# EAGLE board Replicape_B1 (EAGLE 6.6.0), part 1 of 2
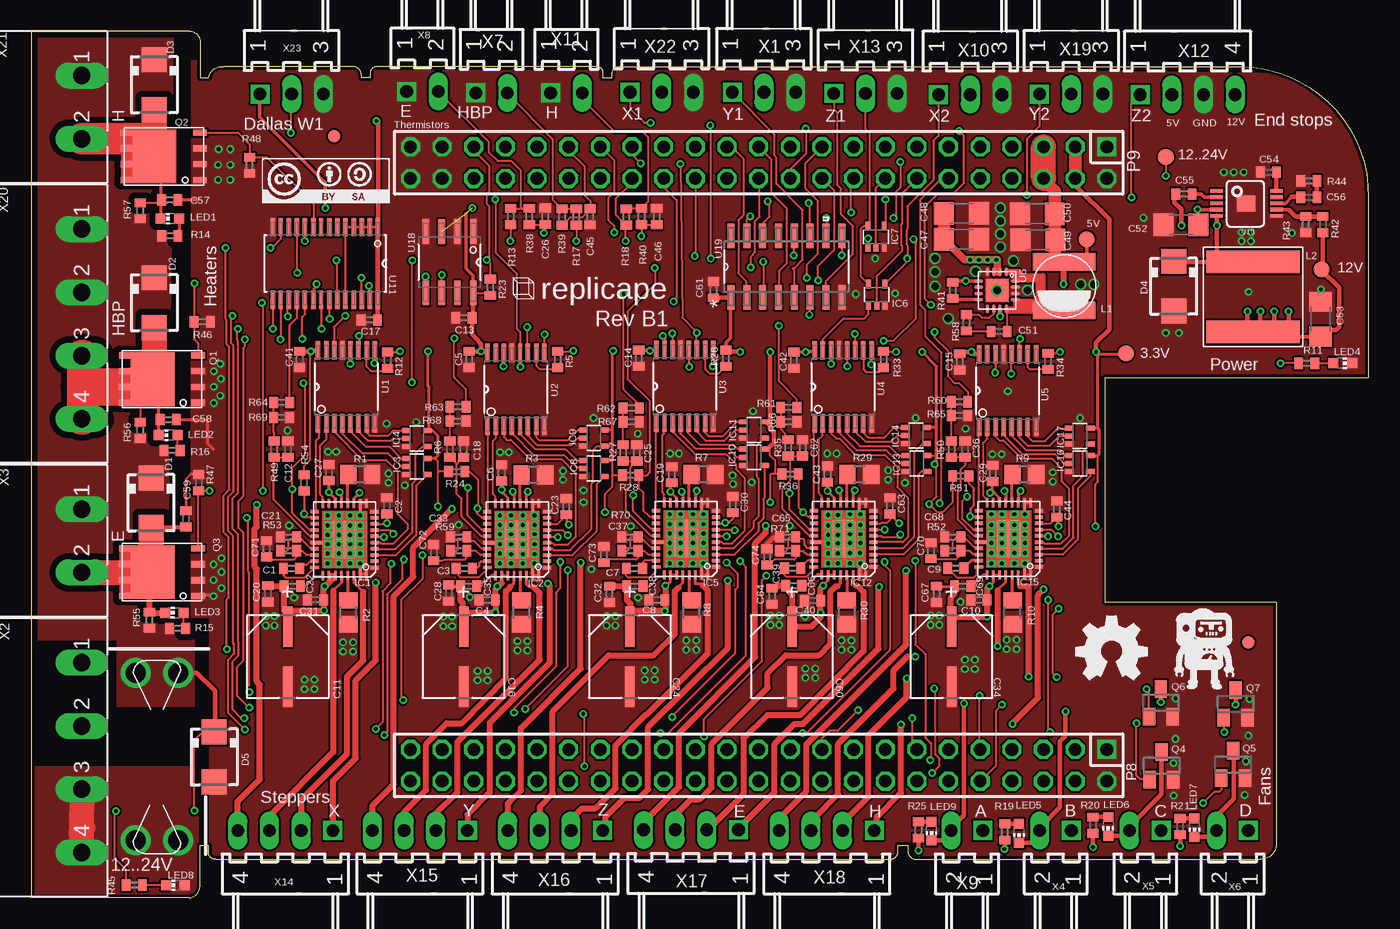
[diagram p0: board, top side]
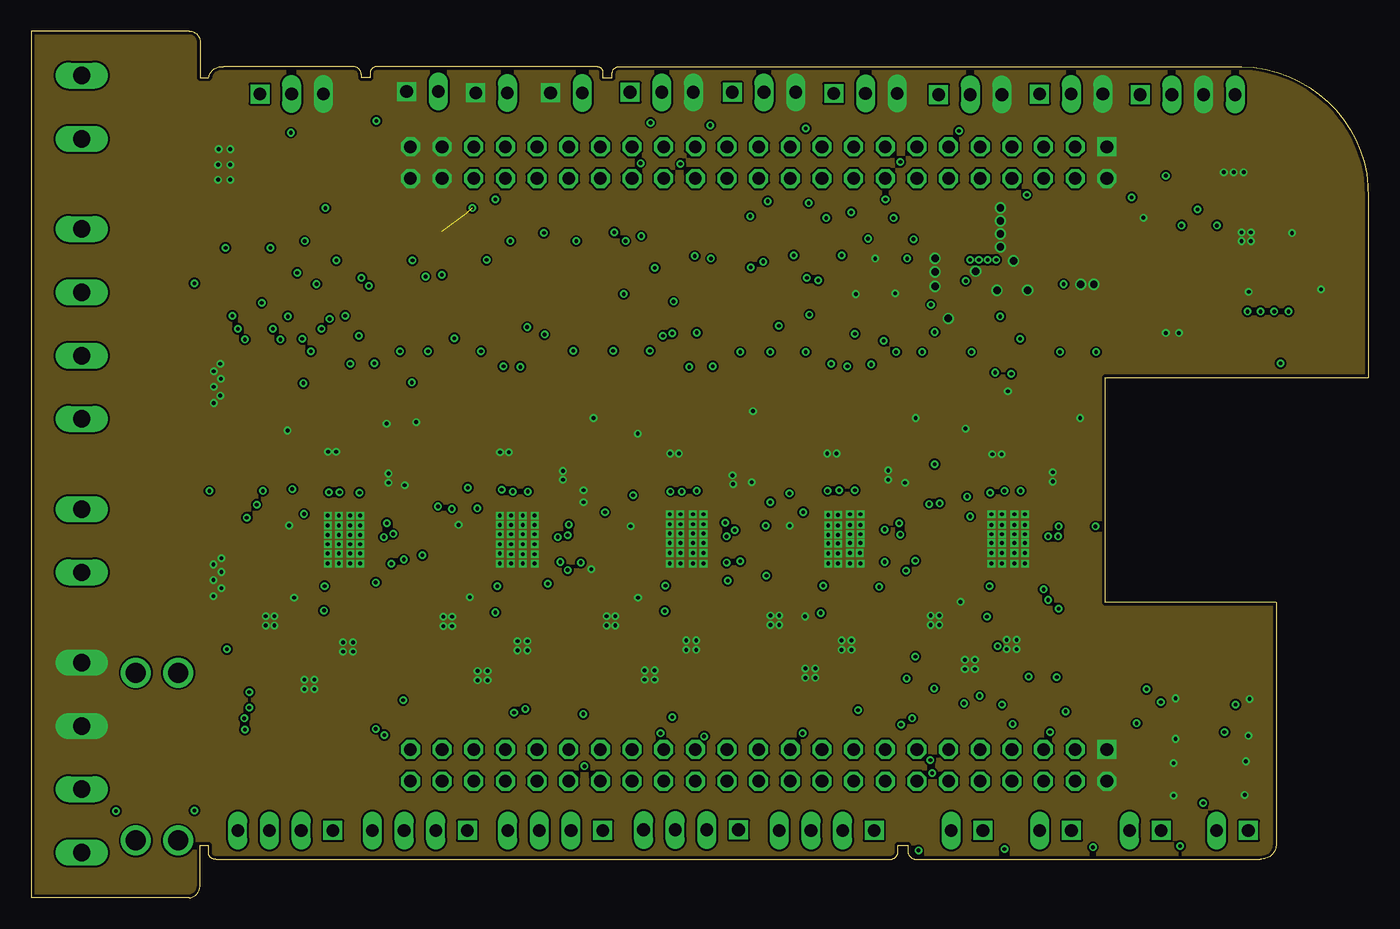
[diagram p1: board, inner layer GND]
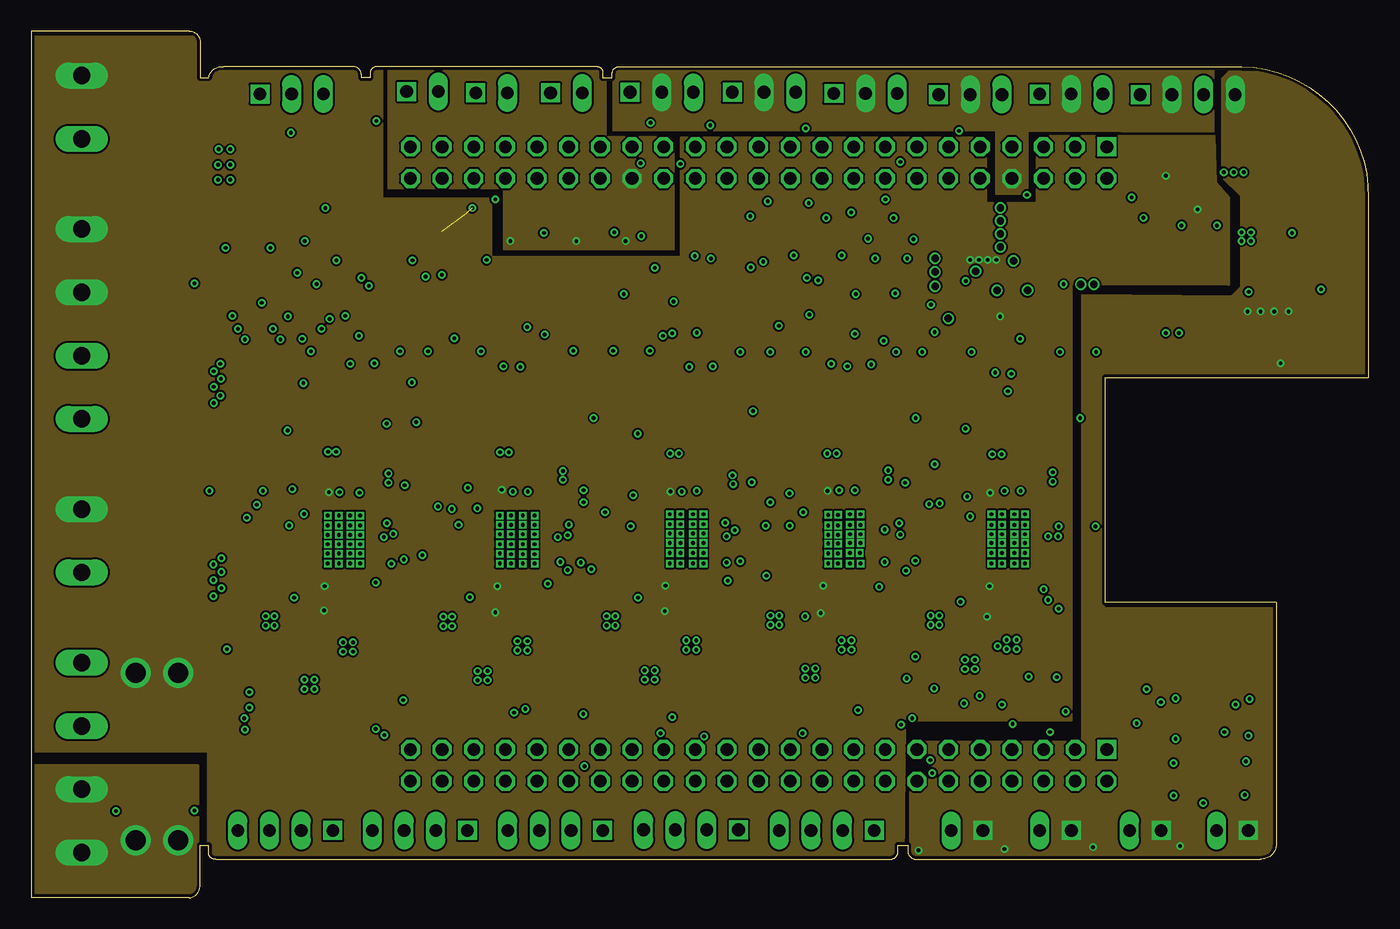
[diagram p2: board, inner layer VCC]
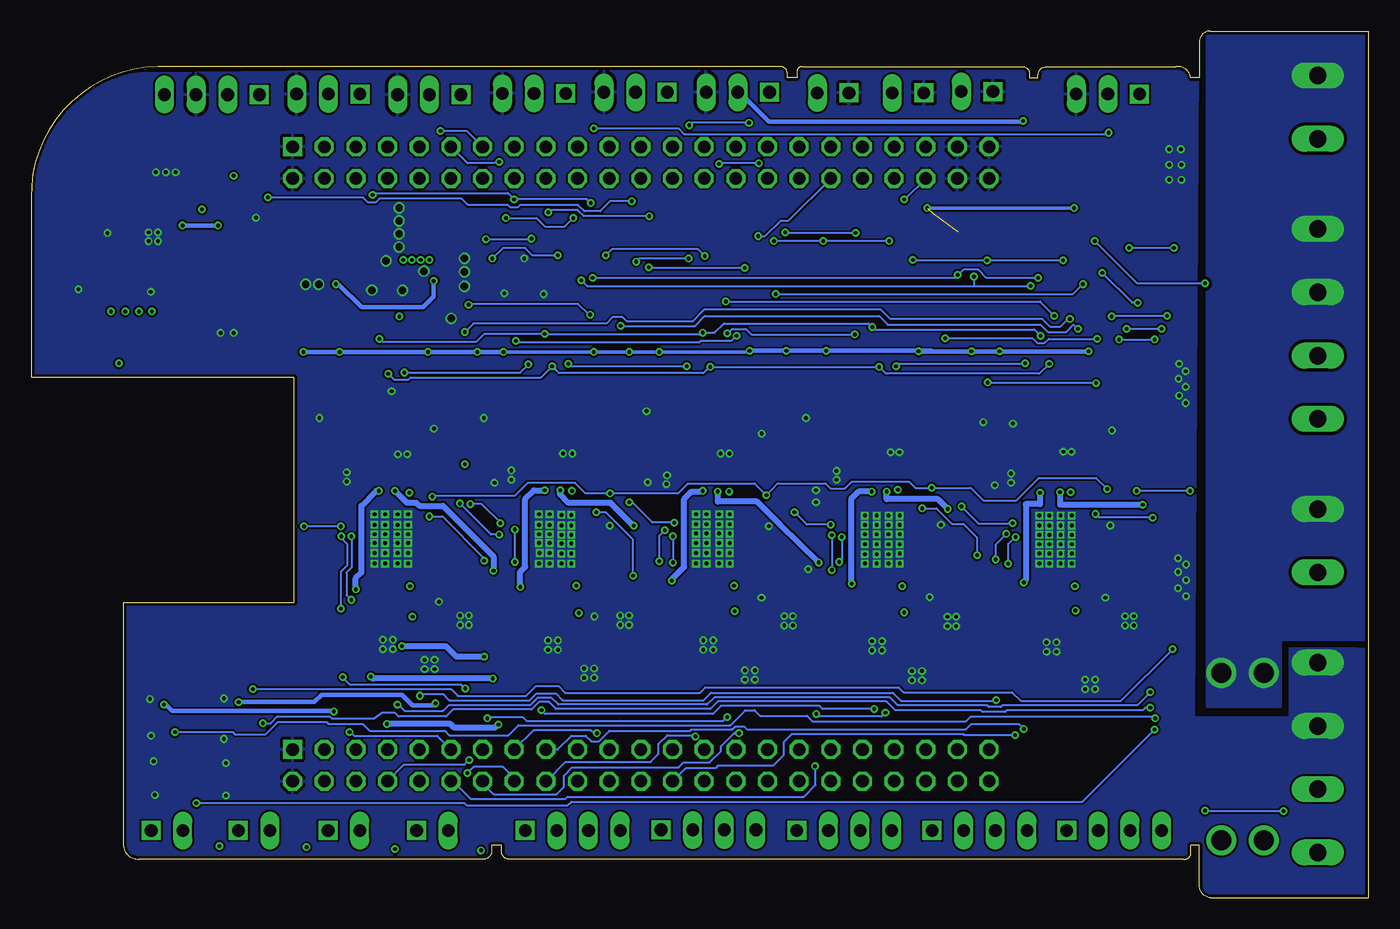
[diagram p3: board, bottom side, seen from below]

Size 107.3 x 69.55 mm. Coordinates in mm from the lower left corner, seen from the top.
Outline: 13.55,4.2 14.25,4.2 14.25,3.5 arc90 14.85,3.1 68.95,3.1 arc90 69.55,3.65 69.55,4.2 70.35,4.2 70.35,3.75 arc90 70.95,3.1 98.65,3.1 arc90 99.9,4.2 99.9,23.7 86.19,23.7 86.19,41.75 107.3,41.75 107.3,56.2 arc90 97.15,66.7 47.17,66.7 arc90 46.62,66.15 46.62,65.8 45.85,65.8 45.85,66.3 arc90 45.45,66.7 27.8,66.7 arc90 27.2,66.2 27.2,65.8 26.5,65.8 26.5,66.05 arc90 25.85,66.7 15.45,66.7 arc90 14.25,65.8 13.55,65.8 13.55,68.75 arc90 12.7,69.55 0,69.55 0,0 12.7,0 arc90 13.55,1.05 13.55,4.2
Copper layers (1*2*3*16): Top 0.035mm / dielectric 0.2mm / GND 0.035mm / dielectric 1.06mm / VCC 0.035mm / dielectric 0.2mm / Bottom 0.035mm
Design rules "default *": minimum track width 6mil, minimum drill 0.3mm, track to track 6mil, track to pad 6mil, pad to pad 6mil, via to via 6mil, smd to smd 0mil, copper to edge 10mil, drill to drill 10mil, minimum pad ring 10mil, minimum via ring 6mil, stop-mask expansion 2mil, vias tented up to drill 100mil, thermal gap 10mil
Net classes: 1 power: width 1.27 mm

## Footprints (pad centres in the part's own frame; a part is rotated, then mirrored left to right if it is on the bottom)
B1,27 = smd 1.27 x 1.27: TP 0,0
C0402 = smd 0.7 x 0.9: 1 -0.65,0; 2 0.65,0
CAPAE660X800N = smd 3.251 x 0.762: 1 -2.413,0; 2 2.413,0
C1206 = smd 1.6 x 1.8: 1 -1.4,0; 2 1.4,0
SMA = smd 2 x 2: A 2,0; C -2,0
3557 = drill 1.6: P$1 -6.73,1.7; P$2 -6.73,-1.7; P$3 6.73,-1.7; P$4 6.73,1.7
QFN36-PAD = smd 0.7 x 0.25: 1 -2.4,2.25; 2 -2.4,1.75; 3 -2.4,1.25; 4 -2.4,0.75; 5 -2.4,0.25; 6 -2.4,-0.25; 7 -2.4,-0.75; 8 -2.4,-1.25; 9 -2.4,-1.75; 10 -2.4,-2.25; 19 2.4,-2.25; 20 2.4,-1.75; 21 2.4,-1.25; 22 2.4,-0.75; 23 2.4,-0.25; 25 2.4,0.75; 26 2.4,1.25; 27 2.4,1.75; 28 2.4,2.25 | smd 0.25 x 0.7: 11 -1.75,-2.9; 13 -0.75,-2.9; 14 -0.25,-2.9; 15 0.25,-2.9; 16 0.75,-2.9; 17 1.25,-2.9; 18 1.75,-2.9; 29 1.75,2.9; 30 1.25,2.9; 31 0.75,2.9; 32 0.25,2.9; 33 -0.25,2.9; 34 -0.75,2.9; 36 -1.75,2.9 | smd 0.25 x 1: 12 -1.25,-2.75; 35 -1.25,2.75 | smd 1 x 0.25: 24 2.25,0.25 | smd 2 x 3: TP 0,0
SC70-5 = smd 0.4 x 0.7: 1 -0.65,-0.85; 2 0,-0.85; 3 0.65,-0.85; 4 0.65,0.85; 5 -0.65,0.85
FIDUCIAL-1X2.5 = smd 1 x 1: 1 0,0
VLC5020 = smd 1.4 x 5: P$1 1.95,0; P$2 -1.95,0
NR8040T330 = smd 1.8 x 7.5: P$1 2.8,0; P$2 -2.8,0
CHIP-LED0603 = smd 0.8 x 0.8: A 0,-0.75; C 0,0.75
DIL-100-2X23 = drill 1.016 square: 1 -27.94,-1.27 | drill 1.016 octagon: 2 -27.94,1.27; 3 -25.4,-1.27; 4 -25.4,1.27; 5 -22.86,-1.27; 6 -22.86,1.27; 7 -20.32,-1.27; 8 -20.32,1.27; 9 -17.78,-1.27; 10 -17.78,1.27; 11 -15.24,-1.27; 12 -15.24,1.27; 13 -12.7,-1.27; 14 -12.7,1.27; 15 -10.16,-1.27; 16 -10.16,1.27; 17 -7.62,-1.27; 18 -7.62,1.27; 19 -5.08,-1.27; 20 -5.08,1.27; 21 -2.54,-1.27; 22 -2.54,1.27; 23 0,-1.27; 24 0,1.27; 25 2.54,-1.27; 26 2.54,1.27; 27 5.08,-1.27; 28 5.08,1.27; 29 7.62,-1.27; 30 7.62,1.27; 31 10.16,-1.27; 32 10.16,1.27; 33 12.7,-1.27; 34 12.7,1.27; 35 15.24,-1.27; 36 15.24,1.27; 37 17.78,-1.27; 38 17.78,1.27; 39 20.32,-1.27; 40 20.32,1.27; 41 22.86,-1.27; 42 22.86,1.27; 43 25.4,-1.27; 44 25.4,1.27; 45 27.94,-1.27; 46 27.94,1.27
8-DFN-EP-(5X6) = smd 1.1 x 0.5: 1 -2.9,1.905; 2 -2.9,0.635; 3 -2.9,-0.635; 4 -2.9,-1.905; 5 2.9,-1.905; 6 2.9,-0.635; 7 2.9,0.635; 8 2.9,1.905 | smd 3.5 x 4.3: TH 0.75,0
SOT23 = smd 1 x 1.4: 1 -0.95,-1.1; 2 0.95,-1.1; 3 0,1.1
R0805 = smd 1.3 x 1.5: 1 -0.95,0; 2 0.95,0
R0402 = smd 0.7 x 0.9: 1 -0.65,0; 2 0.65,0
SOP65P640X120-16N = smd 1.473 x 0.356: 1 -2.921,2.286; 2 -2.921,1.626; 3 -2.921,0.965; 4 -2.921,0.33; 5 -2.921,-0.33; 6 -2.921,-0.965; 7 -2.921,-1.626; 8 -2.921,-2.286; 9 2.921,-2.286; 10 2.921,-1.626; 11 2.921,-0.965; 12 2.921,-0.33; 13 2.921,0.33; 14 2.921,0.965; 15 2.921,1.626; 16 2.921,2.286
QFN-16 = smd 0.75 x 0.3: 1 -1.475,0.75; 2 -1.475,0.25; 3 -1.475,-0.25; 4 -1.475,-0.75; 9 1.475,-0.75; 10 1.475,-0.25; 11 1.475,0.25; 12 1.475,0.75 | smd 0.3 x 0.75: 5 -0.75,-1.475; 6 -0.25,-1.475; 7 0.25,-1.475; 8 0.75,-1.475; 13 0.75,1.475; 14 0.25,1.475; 15 -0.25,1.475; 16 -0.75,1.475 | smd 1.8 x 1.8: P$17 0,0
MSOP10 = smd 0.3 x 1: 1 -1,-2.4; 2 -0.5,-2.4; 3 0.005,-2.4; 4 0.5,-2.4; 5 1,-2.4; 6 1,2.4; 7 0.5,2.4; 8 0.005,2.4; 9 -0.5,2.4; 10 -1,2.4 | smd 1.3 x 1.5: EP 0.02,-0.04
SOP65P640X110-28N = smd 1.473 x 0.356: 1 -2.921,4.216; 2 -2.921,3.581; 3 -2.921,2.921; 4 -2.921,2.286; 5 -2.921,1.626; 6 -2.921,0.965; 7 -2.921,0.33; 8 -2.921,-0.33; 9 -2.921,-0.965; 10 -2.921,-1.626; 11 -2.921,-2.286; 12 -2.921,-2.921; 13 -2.921,-3.581; 14 -2.921,-4.216; 15 2.921,-4.216; 16 2.921,-3.581; 17 2.921,-2.921; 18 2.921,-2.286; 19 2.921,-1.626; 20 2.921,-0.965; 21 2.921,-0.33; 22 2.921,0.33; 23 2.921,0.965; 24 2.921,1.626; 25 2.921,2.286; 26 2.921,2.921; 27 2.921,3.581; 28 2.921,4.216
SOIC127P600X175-8N = smd 1.981 x 0.533: 1 -2.464,1.905; 2 -2.464,0.635; 3 -2.464,-0.635; 4 -2.464,-1.905; 5 2.464,-1.905; 6 2.464,-0.635; 7 2.464,0.635; 8 2.464,1.905
SOIC127P600X175-16N = smd 1.981 x 0.559: 1 -2.464,4.445; 2 -2.464,3.175; 3 -2.464,1.905; 4 -2.464,0.635; 5 -2.464,-0.635; 6 -2.464,-1.905; 7 -2.464,-3.175; 8 -2.464,-4.445; 9 2.464,-4.445; 10 2.464,-3.175; 11 2.464,-1.905; 12 2.464,-0.635; 13 2.464,0.635; 14 2.464,1.905; 15 2.464,3.175; 16 2.464,4.445
7395-03 = drill 1.016 square: 1 2.54,0 | drill 1.016 long: 2 0,0; 3 -2.54,0
MSTBA4 = drill 1.397 long: 1 -7.62,5.08; 2 -2.54,5.08; 3 2.54,5.08; 4 7.62,5.08
MSTBA2 = drill 1.397 long: 1 -2.54,5.08; 2 2.54,5.08
7395-02 = drill 1.016 square: 1 1.27,0 | drill 1.016 long: 2 -1.27,0
7395-04 = drill 1.016 square: 1 3.81,0 | drill 1.016 long: 2 1.27,0; 3 -1.27,0; 4 -3.81,0

## Placement (x,y rotation side)
3.3V  TPB1,27  [B1,27]  87.85,43.67 0 top
5V  TPB1,27  [B1,27]  84.7,52.85 270 top
12..24V  TPB1,27  [B1,27]  91.05,59.45 0 top
12V  TPB1,27  [B1,27]  103.55,50.42 0 top
C1  22nF  [C0402]  20.89,26.43 0 top
C2  0.1uF  [C0402]  28.55,31.45 90 top
C3  22nF  [C0402]  34.75,26.43 0 top
C4  0.1uF  [C0402]  36.6,23.9 180 top
C5  0.1uF  [C0402]  35.15,43.2 270 top
C6  0.1uF  [C0402]  37.75,34.1 90 top
C7  22nF  [C0402]  48.4,26.43 0 top
C8  0.1uF  [C0402]  50.2,23.9 180 top
C9  22nF  [C0402]  74.2,26.45 0 top
C10  0.1uF  [C0402]  76.05,23.9 180 top
C11  100UF  [CAPAE660X800N]  20.6,19.35 270 top
C12  4.7uF  [C0402]  20.6,36 90 top
C13  0.1uF  [C0402]  34.73,46.55 180 top
C14  0.1uF  [C0402]  48.75,43.3 270 top
C15  0.1uF  [C0402]  74.5,43 270 top
C16  100UF  [CAPAE660X800N]  34.7,19.35 270 top
C17  0.1uF  [C0402]  27.13,46.37 180 top
C18  4.7uF  [C0402]  34.7,36 90 top
C19  0.1uF  [C0402]  51.4,33.95 90 top
C20  0.1uF  [C0402]  19,24.4 90 top
C21  4.7uF  [C0402]  20.65,28.95 0 top
C22  0.1uF  [C0402]  20.95,25 180 top
C23  0.1uF  [C0402]  42.95,31.4 90 top
C24  100UF  [CAPAE660X800N]  48.05,19.35 270 top
C25  4.7uF  [C0402]  48.6,35.7 90 top
C26  4.7uF  [C0402]  41.25,54.7 90 top
C27  0.1uF  [C0402]  23.89,34.13 90 top
C28  0.1uF  [C0402]  33.5,24.45 90 top
C29  0.1uF  [C0402]  77.15,34.05 90 top
C30  0.1uF  [C0402]  56.3,31.55 90 top
C31  0.1uF  [C0402]  22.83,23.91 180 top
C32  0.1uF  [C0402]  46.4,24.35 90 top
C33  4.7uF  [C0402]  34.3,28.95 0 top
C34  100UF  [CAPAE660X800N]  73.85,19.35 270 top
C35  0.1uF  [C0402]  35.1,25 180 top
C36  4.7uF  [C0402]  74.95,36 90 top
C37  4.7uF  [C0402]  48.05,28.95 0 top
C38  0.1uF  [C0402]  48.45,25 180 top
C39  22nF  [C0402]  61.1,26.45 0 top
C40  0.1uF  [C0402]  62.7,23.85 180 top
C41  0.1uF  [C0402]  21.55,43.19 270 top
C42  0.1uF  [C0402]  61.2,43.15 270 top
C43  0.1uF  [C0402]  63.9,34 90 top
C44  0.1uF  [C0402]  82.3,31.2 90 top
C45  4.7uF  [C0402]  44.85,54.65 270 top
C46  4.7uF  [C0402]  50.2,54.67 90 top
C47  10uF  [C1206]  74.65,54.92 0 top
C48  10uF  [C1206]  74.65,52.85 0 top
C49  22uF  [C1206]  80.78,52.8 180 top
C50  22uF  [C1206]  80.72,54.9 180 top
C51  22nF  [C0402]  77.67,45.45 0 top
C52  10uF  [C1206]  92.25,54 180 top
C53  10uF  [C1206]  103.47,46.42 90 top
C54  10nF  [C0402]  99.28,58.23 180 top
C55  10nF  [C0402]  92.5,56.48 180 top
C56  1nF  [C0402]  102.53,56.2 0 top
C57  4.7nF  [C0402]  11.12,56 0 top
C58  4.7nF  [C0402]  11,38.38 0 top
C59  4.7nF  [C0402]  12.43,30.4 90 top
C60  100UF  [CAPAE660X800N]  61.05,19.35 270 top
C61  0.1uF  [C0402]  54.75,48.8 90 top
C62  4.7uF  [C0402]  61.9,36.1 90 top
C63  0.1uF  [C0402]  68.9,31.45 90 top
C64  0.1uF  [C0402]  59.45,24.2 90 top
C65  4.7uF  [C0402]  60.7,28.95 0 top
C66  0.1uF  [C0402]  61.2,25.05 180 top
C67  0.1uF  [C0402]  72.65,24.35 90 top
C68  4.7uF  [C0402]  73.95,28.95 0 top
C69  0.1uF  [C0402]  74.75,25 180 top
C70  0.1uF  [C0402]  72.2,27.85 90 top
C71  0.1uF  [C0402]  18.9,28 90 top
C72  0.1uF  [C0402]  32.3,27.7 90 top
C73  0.1uF  [C0402]  45.95,27.55 90 top
C74  0.1uF  [C0402]  59.05,27.35 90 top
D1  MBRA340T3  [SMA]  9.62,31.7 270 top
D2  MBRA340T3  [SMA]  9.88,47.75 270 top
D3  MBRA340T3  [SMA]  9.88,65.25 270 top
D4  MBRA340T3  [SMA]  91.67,49.08 270 top
D5  MBRA340T3  [SMA]  14.7,11.3 270 top
F1  FUSE  [3557]  10.1,11.33 90 top
IC1  TMC2100-LA  [QFN36-PAD]  25.15,28.75 180 top
IC2  TMC2100-LA  [QFN36-PAD]  39,28.75 180 top
IC3  74AHC1G126DCK  [SC70-5]  30.95,34.6 270 top
IC4  74AHC1G126DCK  [SC70-5]  30.95,36.85 270 top
IC5  TMC2100-LA  [QFN36-PAD]  52.55,28.8 180 top
IC6  74AHC1G126DCK  [SC70-5]  67.85,48.4 0 top
IC7  74AHC1G126DCK  [SC70-5]  67.8,53.05 0 top
IC8  74AHC1G126DCK  [SC70-5]  45.15,34.45 270 top
IC9  74AHC1G126DCK  [SC70-5]  45.15,36.9 270 top
IC10  74AHC1G126DCK  [SC70-5]  58,35.35 270 top
IC11  74AHC1G126DCK  [SC70-5]  58,37.55 270 top
IC12  TMC2100-LA  [QFN36-PAD]  65.2,28.8 180 top
IC13  74AHC1G126DCK  [SC70-5]  71.05,34.85 270 top
IC14  74AHC1G126DCK  [SC70-5]  71,37.1 270 top
IC15  TMC2100-LA  [QFN36-PAD]  78.45,28.8 180 top
IC16  74AHC1G126DCK  [SC70-5]  84.15,34.85 270 top
IC17  74AHC1G126DCK  [SC70-5]  84.15,37.05 270 top
JP1  FIDUCIAL1X2.5  [FIDUCIAL-1X2.5]  24.32,61.12 0 top
JP2  FIDUCIAL1X2.5  [FIDUCIAL-1X2.5]  97.65,20.5 0 top
L1  4.7uH  [VLC5020]  82.9,49.1 270 top
L2  33uH  [NR8040T330]  98.05,48.23 270 top
LED1  blue  [CHIP-LED0603]  11.12,54.5 90 top
LED2  blue  [CHIP-LED0603]  11,37.12 90 top
LED3  blue  [CHIP-LED0603]  11.5,22.88 90 top
LED4  blue  [CHIP-LED0603]  105.25,42.9 270 top
LED5  blue  [CHIP-LED0603]  79.28,5.17 180 top
LED6  blue  [CHIP-LED0603]  86.42,5.72 180 top
LED7  blue  [CHIP-LED0603]  93.35,5.62 180 top
LED8  blue  [CHIP-LED0603]  11.57,1 90 top
LED9  blue  [CHIP-LED0603]  72.25,5.35 180 top
LOGO1  OSHW_LOGO_FILLX0200-NT  [OSHW_FILLX200_NOTEXT]  83.86,17.51 0 top
P8  F-2X23-  [DIL-100-2X23]  58.38,10.62 180 top
P9  F-2X23-  [DIL-100-2X23]  58.38,59 180 top
Q1  AON6758  [8-DFN-EP-(5X6)]  10.5,41.62 180 top
Q2  AON6758  [8-DFN-EP-(5X6)]  10.65,59.5 180 top
Q3  AON6758  [8-DFN-EP-(5X6)]  10.5,26.12 180 top
Q4  [SOT23]  90.7,10.6 0 top
Q5  [SOT23]  96.45,10.7 0 top
Q6  [SOT23]  90.65,15.65 0 top
Q7  [SOT23]  96.65,15.55 0 top
R1  0.1R  [R0805]  26.4,33.98 180 top
R2  0.1R  [R0805]  25.45,22.9 90 top
R3  0.1R  [R0805]  40.3,33.92 180 top
R4  0.1R  [R0805]  39.35,22.9 90 top
R5  4.7K  [R0402]  42.25,43.2 90 top
R6  10K  [R0402]  33.6,36 90 top
R7  0.1R  [R0805]  53.95,33.98 180 top
R8  0.1R  [R0805]  53,22.9 90 top
R9  0.1R  [R0805]  79.7,33.98 180 top
R10  0.1R  [R0805]  78.75,22.9 90 top
R11  4.7K  [R0402]  102.35,42.9 180 top
R12  4.7K  [R0402]  28.6,43.15 90 top
R13  4K7, 1%  [R0402]  38.48,54.67 270 top
R14  4.7K  [R0402]  11.12,53.12 180 top
R15  4.7K  [R0402]  11.75,21.62 180 top
R16  4.7K  [R0402]  11.3,35.9 180 top
R17  4K7, 1%  [R0402]  43.75,54.62 270 top
R18  4K7, 1%  [R0402]  47.75,54.62 270 top
R19  4.7K  [R0402]  78.12,5.28 270 top
R20  4.7K  [R0402]  85.2,5.83 270 top
R21  4.7K  [R0402]  92.2,5.72 270 top
R23  4.7K  [R0402]  36.85,49 270 top
R24  4.7K  [R0402]  34.15,34.2 180 top
R25  4.7K  [R0402]  71.2,5.45 270 top
R26  4.7K  [R0402]  55.75,43.3 90 top
R27  10K  [R0402]  47.5,35.7 90 top
R28  4.7K  [R0402]  48.1,33.9 180 top
R29  0.1R  [R0805]  66.45,33.98 180 top
R30  0.1R  [R0805]  65.45,22.9 90 top
R33  4.7K  [R0402]  68.4,43.2 90 top
R34  4.7K  [R0402]  81.6,43.05 90 top
R35  10K  [R0402]  60.75,36.1 90 top
R36  4.7K  [R0402]  60.9,34 180 top
R38  10K  [R0402]  39.98,54.67 270 top
R39  10K  [R0402]  42.6,54.62 270 top
R40  10K  [R0402]  48.98,54.67 270 top
R41  10K  [R0402]  73.95,48.75 90 top
R42  120K  [R0402]  103.65,54.02 90 top
R43  10K  [R0402]  102.28,54.02 270 top
R44  40K  [R0402]  102.53,57.52 180 top
R45  4.7K  [R0402]  8.28,1.02 0 top
R46  4.7K  [R0402]  13.72,46.23 180 top
R47  4.7K  [R0402]  13.45,33.33 270 top
R48  4.7K  [R0402]  17.52,58.77 90 top
R49  10K  [R0402]  19.5,36 90 top
R50  10K  [R0402]  73.85,36 90 top
R51  4.7K  [R0402]  74.6,33.85 180 top
R52  2.2R  [R0402]  73.95,27.85 0 top
R53  2.2R  [R0402]  20.65,27.85 0 top
R54  4.7K  [R0402]  21.9,33.3 90 top
R55  4.7K  [R0402]  9.5,22.27 270 top
R56  4.7K  [R0402]  8.75,37.5 270 top
R57  4.7K  [R0402]  8.75,55.12 270 top
R58  100R  [R0402]  75.05,46.15 90 top
R59  2.2R  [R0402]  34.3,27.85 0 top
R60  4.7K  [R0402]  74.5,39.8 0 top
R61  4.7K  [R0402]  60.8,39.35 0 top
R62  4.7K  [R0402]  48.15,39.3 0 top
R63  4.7K  [R0402]  34.25,39.4 0 top
R64  4.7K  [R0402]  20.1,39.75 0 top
R65  4.7K  [R0402]  74.5,38.7 0 top
R66  4.7K  [R0402]  60.8,38.2 0 top
R67  4.7K  [R0402]  48.15,38.2 0 top
R68  4.7K  [R0402]  34.25,38.25 0 top
R69  4.7K  [R0402]  20.1,38.55 0 top
R70  2.2R  [R0402]  48.05,27.85 0 top
R71  2.2R  [R0402]  60.7,27.85 0 top
U1  SN74AHC595PW  [SOP65P640X120-16N]  25.3,41 90 top
U2  SN74AHC595PW  [SOP65P640X120-16N]  38.9,40.8 90 top
U3  SN74AHC595PW  [SOP65P640X120-16N]  52.45,41.05 90 top
U4  SN74AHC595PW  [SOP65P640X120-16N]  65.15,41 90 top
U5  SN74AHC595PW  [SOP65P640X120-16N]  78.35,40.7 90 top
U6  MCP16321  [QFN-16]  77.5,48.75 270 top
U10  RT8268  [MSOP10]  97.53,55.73 270 top
U11  PCA9685PW  [SOP65P640X110-28N]  23.6,50.9 270 top
U18  CAT24C256  [SOIC127P600X175-8N]  33.58,51 270 top
U19  CD4050BD  [SOIC127P600X175-16N]  60.6,50.65 90 top
U$1  [LOGO_BIG]  93.7,20.05 0 top
U$3  CC-BY-SA  [CC-BY-SA]  23.8,58 0 top
X1  22-05-7038-03  [7395-03]  58.8,64.65 180 top
X2  MSTBA4  [MSTBA4]  -1.02,11.25 270 top
X3  MSTBA2  [MSTBA2]  -1.02,28.65 270 top
X4  22-05-7028-02  [7395-02]  82.2,5.4 0 top
X5  22-05-7028-02  [7395-02]  89.4,5.4 0 top
X6  22-05-7028-02  [7395-02]  96.4,5.4 0 top
X7  22-05-7028-02  [7395-02]  36.95,64.6 180 top
X8  22-05-7028-02  [7395-02]  31.4,64.7 180 top
X9  22-05-7028-02  [7395-02]  75.1,5.4 0 top
X10  22-05-7038-03  [7395-03]  75.35,64.45 180 top
X11  22-05-7028-02  [7395-02]  42.95,64.6 180 top
X12  22-05-7048-04  [7395-04]  92.8,64.45 180 top
X13  22-05-7038-03  [7395-03]  66.95,64.55 180 top
X14  22-05-7048-04  [7395-04]  20.4,5.4 0 top
X15  22-05-7048-04  [7395-04]  31.2,5.4 0 top
X16  22-05-7048-04  [7395-04]  42.05,5.4 0 top
X17  22-05-7048-04  [7395-04]  52.95,5.45 0 top
X18  22-05-7048-04  [7395-04]  63.85,5.4 0 top
X19  22-05-7038-03  [7395-03]  83.45,64.5 180 top
X20  MSTBA4  [MSTBA4]  -1.02,46.05 270 top
X21  MSTBA2  [MSTBA2]  -1.02,63.45 270 top
X22  22-05-7038-03  [7395-03]  50.6,64.65 180 top
X23  22-05-7038-03  [7395-03]  20.9,64.5 180 top

## Library data of the parts
3.3V 5V 12..24V 12V = testpad
C1-C10 C12-C15 C17-C23 C25-C33 C35-C59 C61-C74 R1-R21 R23-R30 R33-R36 R38-R71 = rcl
C11 C16 C24 C34 C60 = Panasonic-EEEFK_EEEFP; MPN: EEE-FK1V101XP; OC_FARNELL: 1850114; OC_NEWARK: 23T0869; PACKAGE: CASE-D8; SUPPLIER: PANASONIC; TOLERANCE: ±20 %; VOLTAGERATING: 35V
D1-D5 = diode
F1 = fuse
IC1 IC2 IC5 IC12 IC15 = we-chip
IC3 IC4 IC6-IC11 IC13 IC14 IC16 IC17 = 74xx-little-de
JP1 JP2 L2 U6 U10 = SparkFun
L1 = resistor
LED1-LED9 = led
LOGO1 = ohw-logo
P8 P9 = con-headers-jp
Q1-Q3 = transistor-power
Q4-Q7 = semicon-smd-ipc
U1-U5 = sn74hc595; MPN: SN74AHC595PW; OC_FARNELL: 1741463; OC_NEWARK: 50R5930; PACKAGE: TSSOP-16; SUPPLIER: Texas Instruments
U11 = custom; MPN: PCA9685PW; OC_FARNELL: 1854074; OC_NEWARK: 19T6398; PACKAGE: TSSOP-28; SUPPLIER: NXP
U18 U$1 = custom
U19 = TI-CD4050BD; MPN: CD4050BD; OC_FARNELL: 1740857; OC_NEWARK: 50R5062; PACKAGE: 16-SOIC; SUPPLIER: Texas Instruments
U$3 = cc-by-sa
X1 X10 X12-X19 X22 X23 = con-molex; OC_FARNELL: unknown; OC_NEWARK: unknown
X2 X20 = con-phoenix-508; MF: FARNELL; MPN: 1757268; OC_FARNELL: 3705195; OC_NEWARK: 71C4163
X3 X21 = con-phoenix-508; MF: FARNELL; MPN: 1757242; OC_FARNELL: 3705171; OC_NEWARK: 71C4161
X4-X9 X11 = con-molex; OC_FARNELL: 9731601; OC_NEWARK: unknown

## Nets
+3V3: 3.3V.TP C2.1 C5.1 C13.1 C14.1 C15.1 C23.1 C30.1 C41.1 C42.1 C44.1 C61.1 C63.1 IC1.8 IC2.8 IC3.5 IC4.5 IC5.8 IC8.5 IC9.5 IC10.5 IC11.5 IC12.8 IC13.5 IC14.5 IC15.8 IC16.5 IC17.5 P9.3 P9.4 R5.2 R12.2 R23.2 R24.2 R26.2 R28.2 R33.2 R34.2 R36.2 R51.2 R54.2 U1.16 U2.16 U3.16 U4.16 U5.16 U18.3 U18.8 U19.1 X23.1
A2_X: IC1.32 X14.3
A2_X1: IC5.32 X16.3
A2_X2: IC2.32 X15.3
A2_X3: IC12.32 X17.3
A2_X4: IC15.32 X18.3
B1_X: IC1.13 X14.1
B1_X1: IC5.13 X16.1
B1_X2: IC2.13 X15.1
B1_X3: IC12.13 X17.1
B1_X4: IC15.13 X18.1
COMP: C56.1 U10.8
DALLAS_W1: P9.22 X23.2
DIR_E: IC12.7 P8.15
DIR_H: IC15.7 P8.16
DIR_X: IC1.7 P8.26
DIR_Y: IC2.7 P8.19
DIR_Z: IC5.7 P8.14
ENABLE: IC1.22 IC2.22 IC5.22 IC12.22 IC15.22 P9.41 R23.1 U11.23
END_STOP_X_1: P9.25 U19.2
END_STOP_X_1_IN: U19.3 X22.1
END_STOP_X_2: P9.11 U19.10
END_STOP_X_2_IN: IC6.4 U19.9 X10.1
END_STOP_Y_1: P9.23 U19.4
END_STOP_Y_1_IN: U19.5 X1.1
END_STOP_Y_2: P9.28 U19.12
END_STOP_Y_2_IN: IC7.4 U19.11 X19.1
END_STOP_Z_1: P9.13 U19.6
END_STOP_Z_1_IN: U19.7 X13.1
END_STOP_Z_2: P9.18 U19.15
END_STOP_Z_2_IN: U19.14 X12.1
FAN0: Q6.1 U11.13
FAN1: Q7.1 U11.15
FAN2: Q4.1 U11.16
FAN3: Q5.1 U11.17
FAULT_E: IC12.20 P8.18 R36.1
FAULT_H: IC15.20 P8.8 R51.1
FAULT_X: IC1.20 P8.10 R54.1
FAULT_Y: IC2.20 P8.9 R24.1
FAULT_Z: IC5.20 P9.24 R28.1
GND: C2.2 C4.2 C5.2 C6.2 C8.2 C10.2 C11.2 C12.2 C13.2 C14.2 C15.2 C16.2 C17.2 C18.2 C19.2 C20.1 C21.1 C23.2 C24.2 C25.2 C26.2 C27.2 C28.1 C29.2 C30.2 C31.2 C32.1 C33.1 C34.2 C36.2 C37.1 C40.2 C41.2 C42.2 C43.2 C44.2 C45.2 C46.2 C47.2 C48.2 C49.2 C50.2 C52.2 C53.2 C54.2 C57.2 C58.2 C59.2 C60.2 C61.2 C62.2 C63.2 C64.1 C65.1 C67.1 C68.1 C70.2 C71.2 C72.2 C73.2 C74.2 D4.A D5.A IC1.1 IC1.10 IC1.11 IC1.12 IC1.24 IC1.35 IC1.36 IC1.TP IC2.1 IC2.10 IC2.11 IC2.12 IC2.24 IC2.35 IC2.36 IC2.TP IC3.3 IC4.3 IC5.1 IC5.10 IC5.11 IC5.12 IC5.24 IC5.35 IC5.36 IC5.TP IC6.3 IC7.3 IC8.3 IC9.3 IC10.3 IC11.3 IC12.1 IC12.10 IC12.11 IC12.12 IC12.24 IC12.35 IC12.36 IC12.TP IC13.3 IC14.3 IC15.1 IC15.10 IC15.11 IC15.12 IC15.24 IC15.35 IC15.36 IC15.TP IC16.3 IC17.3 LED4.C P8.1 P8.2 P9.1 P9.2 P9.43 P9.44 P9.45 P9.46 Q1.1 Q1.2 Q1.3 Q2.1 Q2.2 Q2.3 Q3.1 Q3.2 Q3.3 Q4.2 Q5.2 Q6.2 Q7.2 R1.1 R2.1 R3.1 R4.1 R7.1 R8.1 R9.1 R10.1 R29.1 R30.1 R43.2 R44.2 R46.1 R47.1 R48.1 R65.2 R66.2 R67.2 R68.2 R69.2 U1.8 U1.13 U2.8 U2.13 U3.8 U3.13 U4.8 U4.13 U5.8 U5.13 U6.4 U6.14 U6.15 U6.P$17 U10.6 U10.EP U11.14 U18.1 U18.2 U18.4 U19.8 X1.3 X2.1 X2.2 X7.1 X8.1 X10.3 X11.1 X12.3 X13.3 X19.3 X22.3 X23.3
HEATER_EXT1: Q3.4 R47.2 U11.11
HEATER_EXT2: Q2.4 R48.2 U11.9
HEATER_HBP: Q1.4 R46.2 U11.10
I2C2_SCL: P9.19 U11.26 U18.6
I2C2_SDA: P9.20 U11.27 U18.5
IREF_E: R35.2 R61.1 R66.1
IREF_E_RAW: R61.2 U11.21
IREF_H: R50.2 R60.1 R65.1
IREF_H_RAW: R60.2 U11.22
IREF_X: R49.2 R64.1 R69.1
IREF_X_RAW: R64.2 U11.18
IREF_Y: R6.2 R63.1 R68.1
IREF_Y_RAW: R63.2 U11.19
IREF_Z: R27.2 R62.1 R67.1
IREF_Z_RAW: R62.2 U11.20
N$1: C51.1 R58.1
N$2: IC1.15 X14.4
N$3: C3.2 IC2.27
N$4: IC4.1 U1.7
N$5: IC4.2 U1.6
N$6: IC1.18 U1.2
N$8: LED8.C R45.2
N$9: LED5.A R19.1
N$11: LED9.C Q6.3 X9.2
N$12: C9.2 IC15.27
N$13: IC15.14 R9.2
N$14: C7.2 IC5.27
N$15: IC5.14 R7.2
N$16: C1.1 IC1.28
N$17: C1.2 IC1.27
N$18: IC1.14 R1.2
N$19: IC1.33 R2.2
N$20: C12.1 IC1.23 R49.1
N$21: LED9.A R25.1
N$22: IC1.34 X14.2
N$24: IC5.33 R8.2
N$25: R26.1 U3.10
N$26: C25.1 IC5.23 R27.1
N$27: C7.1 IC5.28
N$28: IC5.3 IC10.4
N$29: IC5.15 X16.4
N$30: IC15.33 R10.2
N$31: C21.2 IC1.25 R53.1
N$32: IC1.3 IC3.4
N$33: C22.1 IC1.29
N$34: IC3.2 U1.4
N$35: IC2.14 R3.2
N$36: IC2.33 R4.2
N$37: R5.1 U2.10
N$38: C18.1 IC2.23 R6.1
N$39: IC1.4 IC4.4
N$40: IC3.1 U1.5
N$41: C3.1 IC2.28
N$42: IC2.3 IC8.4
N$43: IC1.19 U1.1
N$44: IC1.5 U1.3
N$45: IC2.15 X15.4
N$46: IC2.34 X15.2
N$47: C33.2 IC2.25 R59.1
N$48: C35.1 IC2.29
N$49: IC2.4 IC9.4
N$50: IC5.34 X16.2
N$51: C37.2 IC5.25 R70.1
N$52: C38.1 IC5.29
N$53: IC2.5 U2.3
N$54: IC5.4 IC11.4
N$55: IC5.5 U3.3
N$56: IC2.18 U2.2
N$57: IC5.18 U3.2
N$58: IC5.19 U3.1
N$59: IC11.1 U3.7
N$61: IC11.2 U3.6
N$62: IC10.1 U3.5
N$63: IC10.2 U3.4
N$64: C57.1 D3.A LED1.C Q2.5 Q2.6 Q2.7 Q2.8 Q2.TH R57.1 X21.2
N$65: IC2.19 U2.1
N$66: IC9.1 U2.7
N$67: IC9.2 U2.6
N$68: IC8.1 U2.5
N$69: IC8.2 U2.4
N$70: C39.2 IC12.27
N$71: IC12.14 R29.2
N$72: IC12.33 R30.2
N$73: R33.1 U4.10
N$74: C62.1 IC12.23 R35.1
N$75: C39.1 IC12.28
N$76: IC12.3 IC13.4
N$77: IC12.15 X17.4
N$78: IC12.34 X17.2
N$79: C65.2 IC12.25 R71.1
N$80: C66.1 IC12.29
N$81: IC12.4 IC14.4
N$82: IC12.5 U4.3
N$83: IC12.18 U4.2
N$84: IC12.19 U4.1
N$85: IC14.1 U4.7
N$86: IC14.2 U4.6
N$87: IC13.1 U4.5
N$88: R34.1 U5.10
N$89: C36.1 IC15.23 R50.1
N$90: C9.1 IC15.28
N$91: IC15.3 IC16.4
N$92: IC15.15 X18.4
N$93: IC13.2 U4.4
N$94: IC15.34 X18.2
N$95: C68.2 IC15.25 R52.1
N$96: LED4.A R11.1
N$97: R12.1 U1.10
N$98: C69.1 IC15.29
N$99: IC15.4 IC17.4
N$100: IC15.5 U5.3
N$101: IC15.18 U5.2
N$102: IC15.19 U5.1
N$103: IC17.1 U5.7
N$104: IC17.2 U5.6
N$105: IC16.1 U5.5
N$106: IC16.2 U5.4
N$107: C70.1 IC15.26 R52.2
N$108: C71.1 IC1.26 R53.2
N$109: C73.1 IC5.26 R70.2
N$110: C72.1 IC2.26 R59.2
N$111: C74.1 IC12.26 R71.2
N$114: LED7.C Q5.3 X6.2
N$115: LED6.C Q4.3 X5.2
N$116: LED5.C Q7.3 X4.2
N$117: LED6.A R20.1
N$118: LED7.A R21.1
N$127: LED3.A R15.1
N$128: R58.2 U6.10
N$129: LED1.A R14.1
N$130: LED2.A R16.1
N$233: R42.2 R43.1 U10.7
N$234: C59.1 D1.A LED3.C Q3.5 Q3.6 Q3.7 Q3.8 Q3.TH R55.1 X3.2
N$237: R13.1 R38.1 X8.2
N$238: C55.2 D4.C L2.P$2 U10.5
N$239: R41.1 U6.8
N$240: R18.1 R40.1 X11.2
N$241: R17.1 R39.1 X7.2
N$242: C58.1 D2.A LED2.C Q1.5 Q1.6 Q1.7 Q1.8 Q1.TH R56.1 X20.3 X20.4
N$243: C54.1 U10.10
N$245: C55.1 U10.2
N$246: C56.2 R44.1
SER_2: U1.9 U2.14
SER_3: U2.9 U3.14
SER_4: U3.9 U4.14
SER_5: U4.9 U5.14
SERVO_0: IC6.2 P9.14
SERVO_0_EN: IC6.1 U4.15
SERVO_1: IC7.2 P9.16
SERVO_1_EN: IC7.1 U3.15
SPI1_CS1: P9.42 U1.12 U2.12 U3.12 U4.12 U5.12
SPI1_MOSI: P9.30 U1.14
SPI1_SCLK: P9.31 U1.11 U2.11 U3.11 U4.11 U5.11
STEP_E: IC12.6 P9.12
STEP_H: IC15.6 P8.11
STEP_X: IC1.6 P8.17
STEP_Y: IC2.6 P8.12
STEP_Z: IC5.6 P8.13
SW: C51.2 L1.P$1 U6.1 U6.12 U6.13 U6.16
SYS_5V: C17.1 IC6.5 IC7.5 P9.8 U11.1 U11.2 U11.3 U11.4 U11.5 U11.24 U11.28 X1.2 X10.2 X12.2 X13.2 X19.2 X22.2
TERM_EXT1: C26.1 P9.33 R38.2
TERM_EXT2: C46.1 P9.36 R40.2
TERM_HBP: C45.1 P9.35 R39.2
VDD_5V: 5V.TP C49.1 C50.1 L1.P$2 P9.5 P9.6 R41.2 U6.5
VDD_12V: 12V.TP C53.1 L2.P$1 R11.2 R19.2 R20.2 R21.2 R25.2 R42.1 X4.1 X5.1 X6.1 X9.1 X12.4
VDD_ADC: P9.32 R13.2 R17.2 R18.2
VDD_IN: 12..24V.TP C4.1 C6.1 C8.1 C10.1 C11.1 C16.1 C19.1 C20.2 C22.2 C24.1 C27.1 C28.2 C29.1 C31.1 C32.2 C34.1 C35.2 C38.2 C40.1 C43.1 C47.1 C48.1 C52.1 C60.1 C64.2 C66.2 C67.2 C69.2 D1.C D2.C D3.C D5.C F1.P$3 F1.P$4 IC1.16 IC1.30 IC1.31 IC2.16 IC2.30 IC2.31 IC5.16 IC5.30 IC5.31 IC12.16 IC12.30 IC12.31 IC15.16 IC15.30 IC15.31 R14.2 R15.2 R16.2 R45.1 R55.2 R56.2 R57.2 U6.2 U6.3 U6.11 U10.4 X3.1 X20.1 X20.2 X21.1
VIN: F1.P$1 F1.P$2 LED8.A X2.3 X2.4